# Altium PCB NutriTech PCB.PcbDoc
Units mm, origin at the board's own origin, x right, y up, seen from the top; angles counter-clockwise.
Board outline 55 x 70 mm, 2 copper layers (Top Layer, Bottom Layer); 20 components, 14 nets, 80 pads, 0 vias.
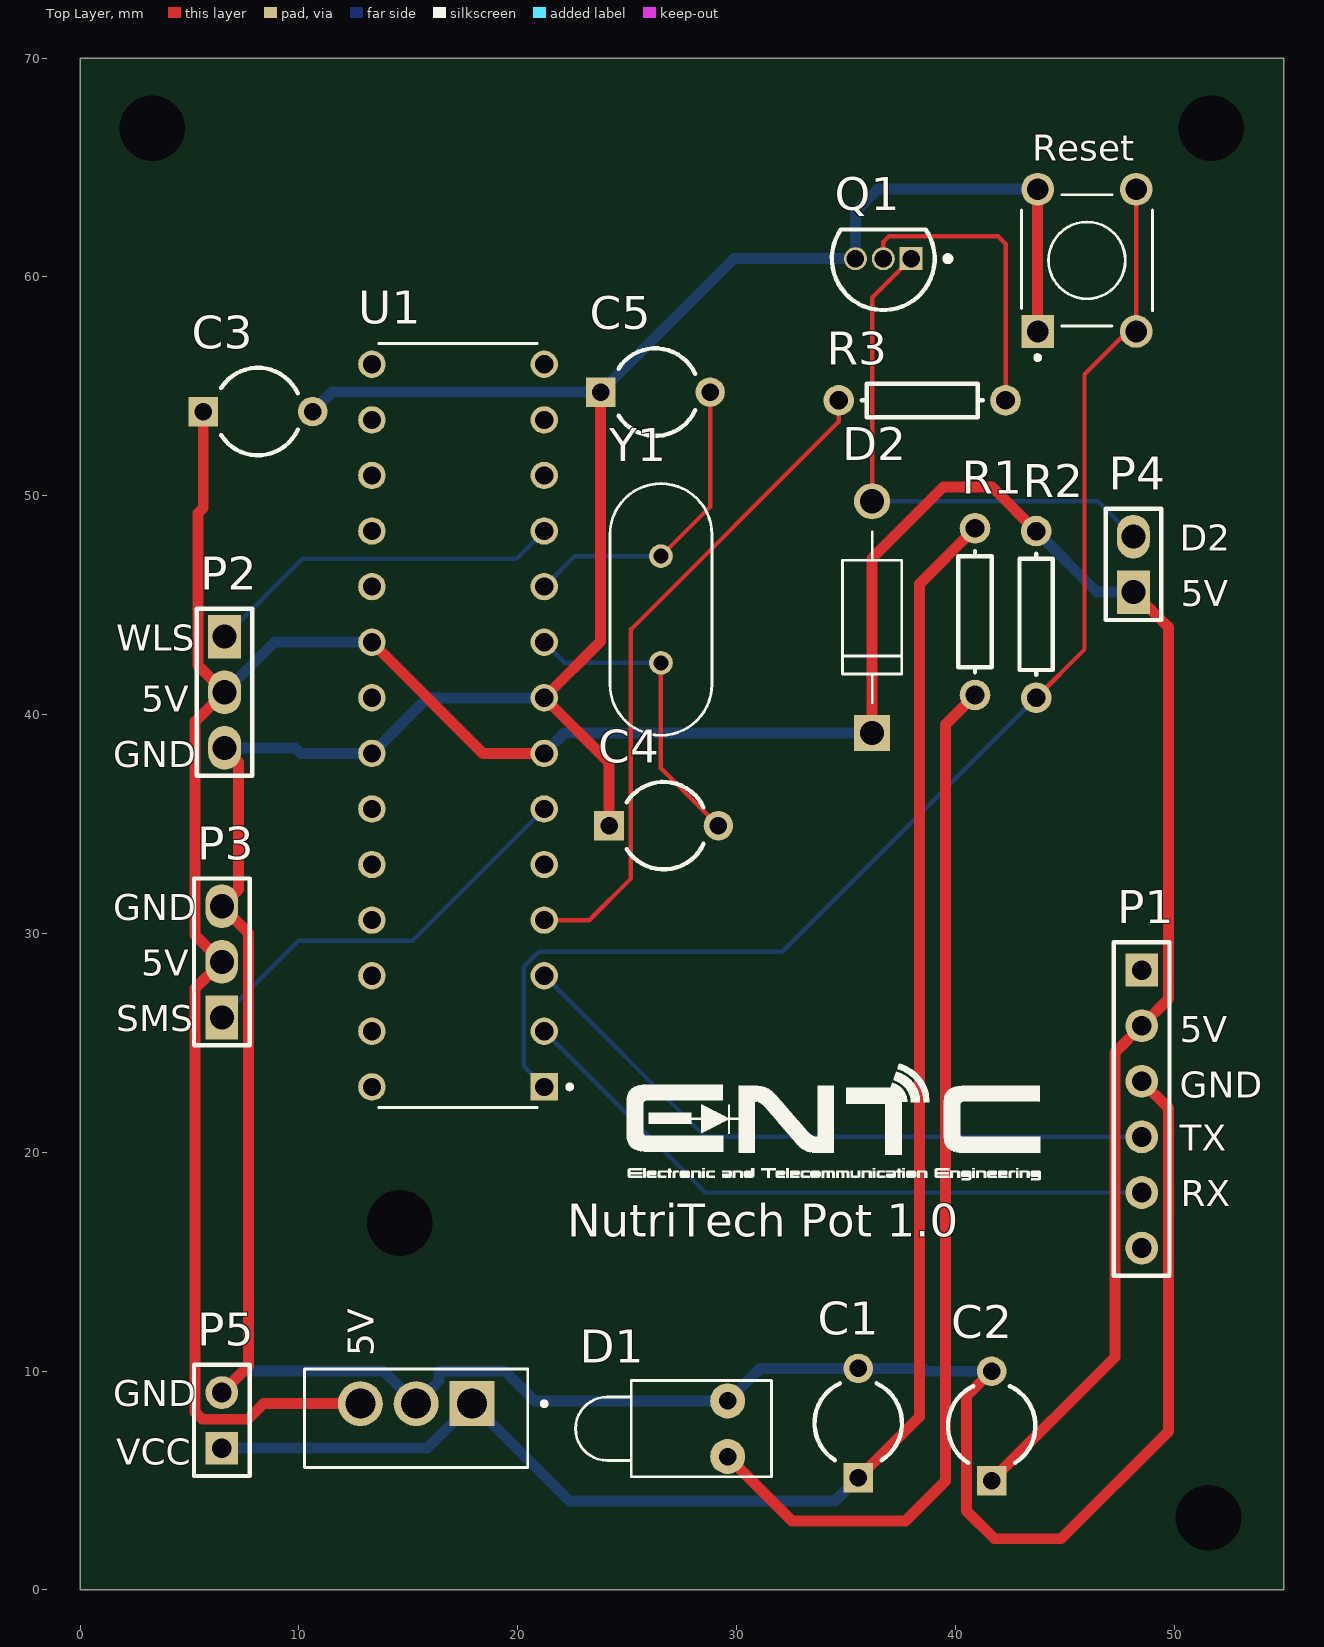
[diagram p0: Top Layer view]
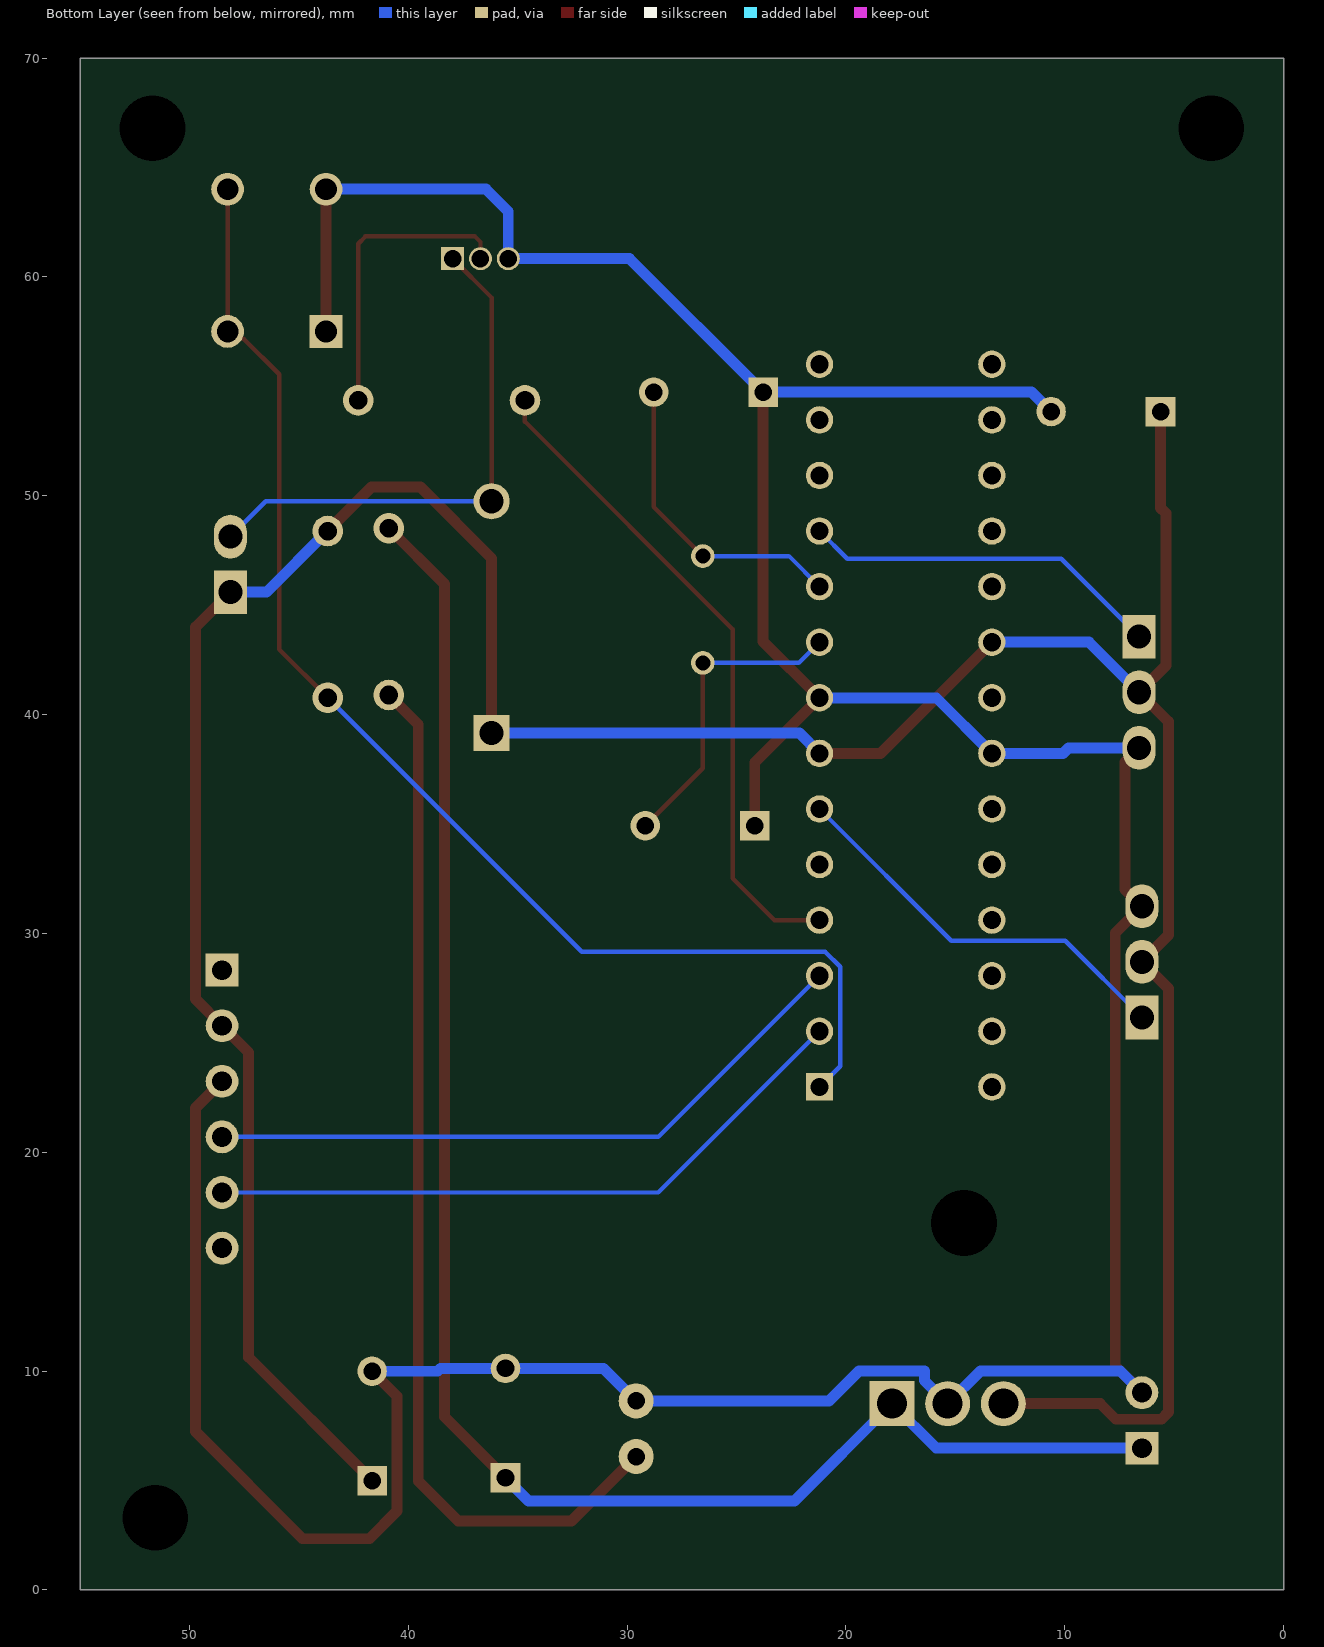
[diagram p1: Bottom Layer view, seen from below]

## Layer stack, top to bottom
Top Solder: solder mask 0.0102, Solder Resist, Dk 3.5
Top Layer: signal copper 0.0356
Dielectric 1: dielectric 0.32, FR-4, Dk 4.8
Bottom Layer: signal copper 0.0356
Bottom Solder: solder mask 0.0102, Solder Resist, Dk 3.5

## Board outline
0,0 55,0 55,70 0,70

## Design rules (kind name [scope] priority, off if disabled: settings)
BoardOutlineClearance [All] p1: gap=0.2 ignorepadtopadclearanceinfootprint=FALSE
Clearance [All] p1: gap=0.203 ignorepadtopadclearanceinfootprint=FALSE except(0.25: Arc-Hole Track-Hole SMDPad-Hole THPad-Hole Via-Hole Fill-Hole Poly-Hole Region-Hole Text-Hole)
ComponentClearance [All] p1: gap=0.127 collisioncheckmode=3 verticalgap=0.127 showdistances=TRUE
DiffPairsRouting [All] p1: maxlimit=0.381 minlimit=0.203 mostfreqgap=0.203 toplayer_minwidth=0.203 toplayer_maxwidth=25.4 toplayer_prefwidth=0.203 bottomlayer_minwidth=0.203 bottomlayer_maxwidth=25.4 bottomlayer_prefwidth=0.203 maxuncoupledlength=12.7
Height [All] p1: minheight=0 maxheight=1816.048 prefheight=12.7
HoleSize [All] p1: absolutevalues=TRUE maxlimit=6.3 minlimit=0.3 maxpercent=80.000 minpercent=20.000
HoleToHoleClearance [All] p1: gap=0.25 allowstackedmicrovias=FALSE
MinimumAnnularRing [All] p1: minimumring=0.076
MinimumSolderMaskSliver [All] p1: minsoldermaskwidth=0
PlaneClearance [All] p1: clearance=0.203
PlaneConnect PlaneConnectPowerPads [InPadClass('PowerPads')] p1: planeconnectstyle=Direct reliefexpansion=0.508 reliefentries=4 reliefconductorwidth=0.254 reliefairgap=0.254
PlaneConnect [All] p2: pad.planeconnectstyle=Relief pad.reliefexpansion=0.3 pad.reliefentries=4 pad.reliefconductorwidth=0.203 pad.reliefairgap=0.203 via.planeconnectstyle=Direct via.reliefexpansion=0.3 via.reliefentries=4 via.reliefconductorwidth=0.127 via.reliefairgap=0.127
PolygonConnect PolygonConnectPowerPads [All vs (InPadClass('PowerPads'))] p1: connectstyle=Direct reliefconductorwidth=0.254 reliefentries=4 polygonreliefangle="90 Angle" airgapwidth=0.254
PolygonConnect [All] p2: thpad.connectstyle=Relief thpad.reliefconductorwidth=0.203 thpad.reliefentries=4 thpad.polygonreliefangle="90 Angle" thpad.airgapwidth=0.203 smdpad.connectstyle=Relief smdpad.reliefconductorwidth=0.203 smdpad.reliefentries=4 smdpad.polygonreliefangle="90 Angle" smdpad.airgapwidth=0.203 via.connectstyle=Direct via.reliefconductorwidth=0.127 via.reliefentries=4 via.polygonreliefangle="90 Angle" via.airgapwidth=0.127
RoutingVias [All] p1: holewidth=0.3 width=0.6 viastyle="Through Hole" minholewidth=0.3 minwidth=0.6 maxholewidth=0.6 maxwidth=6.6
SilkToSilkClearance [All] p1: silktosilkclearance=0
SilkToSolderMaskClearance [IsPad] p1: minsilkscreentomaskgap=0.127 clearancetoexposedcopper=TRUE
SolderMaskExpansion [All] p1: expansion=0.075 istentingtop=FALSE
Width VCC [InNet('VCC')] p1: maxlimit=0.5 minlimit=0.5 preferedwidth=0.5 minimp=50.000000 maximp=50.000000 favimp=50.000000
Width GND [InNet('GND')] p2: maxlimit=0.5 minlimit=0.5 preferedwidth=0.5 minimp=50.000000 maximp=50.000000 favimp=50.000000
Width 5V [InNet('+5V')] p3: maxlimit=0.5 minlimit=0.5 preferedwidth=0.5 minimp=50.000000 maximp=50.000000 favimp=50.000000
Width [All] p4: maxlimit=25.4 minlimit=0.203 preferedwidth=0.203 minimp=50.000000 maximp=50.000000 favimp=50.000000
20 further rules are at their usual default settings.

## Components (designator, comment, footprint, x,y, rotation, side; value= is the part's Value field where it differs from the comment)
5V "L7805" TO255P1020X450X2000-3 15.357,7.846 r180 top (schematic designator VR1)
C1 "Cap2" CAPR5-4X5 35.56,7.62 r90 top value=10uF
C2 "Cap2" CAPR5-4X5 41.656,7.493 r90 top value=1uF
C3 "Cap2" CAPR5-4X5 8.128,53.848 r0 top value=10uF
C4 "Cap2" CAPR5-4X5 26.67,34.925 r0 top value=22pF
C5 "Cap2" CAPR5-4X5 26.289,54.737 r0 top value=22pF
D1 "LED1" LED-1 29.591,7.366 r180 top
D2 "1N4007" DIOAD1060W80L520D270 36.195,44.45 r90 top
P1 "Header 6" HDR1X6 48.514,28.321 r270 top
P2 "Header 3" HDR1X3 6.604,43.561 r270 top
P3 "Header 3" HDR1X3 6.477,26.162 r90 top
P4 "Header 2" HDR1X2#1 48.133,45.593 r90 top
P5 "Header 2" HDR1X2#2 6.477,6.477 r90 top
Q1 "BC337" ONSC-TO-92-3-29-11 36.703,60.833 r180 top
R1 "Res1" AXIAL-0.3 40.894,44.704 r90 top value=1K
R2 "Res1" AXIAL-0.3 43.688,44.577 r270 top value=1K
R3 "Res1" AXIAL-0.3 38.481,54.356 r0 top value=1K
Reset "1825910-6" SW_1825910-6-4 46.01,60.758 r90 top (schematic designator SW1)
U1 "ATMEGA328-PU" DIP787W46P254L3467H508Q28 17.272,39.497 r180 top
Y1 "HC-49/U-S16000000ABJB" XTAL_HC49P488W43L1150T466H350 26.543,44.804 r270 top

## Footprints (in the part's own frame and the unit in brackets; to place one, negate y for a bottom-side part, rotate by r counter-clockwise, add the part's x,y. Pads: shape width x height; smd on the part's side, far side on the other; paste and mask are expansions set on the pad)
AXIAL-0.3 [mm] "Axial Device, Thru-Hole; 2 Leads; 0.3 in Pin Spacing"
  round 1.4 hole 0.85: 1(-3.81,0) 2(3.81,0)
  silkscreen extent -2.77,-0.76 2.77,0.76
CAPR5-4X5 [mm] "Capacitor; 2 Leads"
  rect 1.35x1.35 hole 0.8: 1(-2.5,0)
  round 1.35 hole 0.8: 2(2.5,0)
  silkscreen extent -1.69,-2 1.82,2
DIOAD1060W80L520D270 [mm]
  round 1.65 hole 1.1: A(5.3,0)
  rect 1.65x1.65 / inner round 1.65 / far side rect 1.65x1.65 hole 1.1: C(-5.3,0)
  silkscreen extent -3.9,-1.35 3.9,1.35, body extent -4.24,-1 4.24,1, height 2
DIP787W46P254L3467H508Q28 [mm]
  rect 1.25x1.25 / inner round 1.25 / far side rect 1.25x1.25 hole 0.83: 1(-3.937,16.51)
  round 1.25 hole 0.83: 2(-3.937,13.97) 3(-3.937,11.43) 4(-3.937,8.89) 5(-3.937,6.35) 6(-3.937,3.81) 7(-3.937,1.27) 8(-3.937,-1.27) 9(-3.937,-3.81) 10(-3.937,-6.35) 11(-3.937,-8.89) 12(-3.937,-11.43) 13(-3.937,-13.97) 14(-3.937,-16.51) 15(3.937,-16.51) 16(3.937,-13.97) 17(3.937,-11.43) 18(3.937,-8.89) 19(3.937,-6.35) 20(3.937,-3.81) 21(3.937,-1.27) 22(3.937,1.27) 23(3.937,3.81) 24(3.937,6.35) 25(3.937,8.89) 26(3.937,11.43) 27(3.937,13.97) 28(3.937,16.51)
  silkscreen extent -5.2,-17.45 3.62,17.45, body extent -3.95,-17.34 3.95,17.34, height 4.57
HDR1X2#1 [mm] "Connector; Header; 2 Position"
  rect 2x1.5 hole 1.1: 1(0,0)
  oval 2x1.5 hole 1.1: 2(2.54,0)
  silkscreen extent -1.27,-1.27 3.81,1.27
HDR1X2#2 [mm] "Connector; Header; 2 Position"
  rect 1.5x1.5 hole 0.9: 1(0,0)
  round 1.5 hole 0.9: 2(2.54,0)
  silkscreen extent -1.27,-1.27 3.81,1.27
HDR1X3 [mm] "Connector; Header; 3 Position"
  rect 2x1.5 hole 1.1: 1(0,0)
  oval 2x1.5 hole 1.1: 2(2.54,0) 3(5.08,0)
  silkscreen extent -1.27,-1.27 6.35,1.27
HDR1X6 [mm] "Connector; Header; 6 Position"
  rect 1.5x1.5 hole 0.9: 1(0,0)
  round 1.5 hole 0.9: 2(2.54,0) 3(5.08,0) 4(7.62,0) 5(10.16,0) 6(12.7,0)
  silkscreen extent -1.27,-1.27 13.97,1.27
LED-1 [mm] "LED; 2 Leads"
  round 1.6 hole 0.8: 1(0,1.27) 2(0,-1.27)
  silkscreen extent -2,-2.2 6.95,2.2
ONSC-TO-92-3-29-11 [mm] "TO, 3-Leads, Body Dia 4.7mm, Pitch 1.27mm"
  rect 1.05x1.05 hole 0.8: 1(-1.27,0)
  round 1.05 hole 0.8: 2(0,0) 3(1.27,0)
  silkscreen extent -3.08,-1.34 2.35,2.35, body extent -2.35,-1.33 2.36,2.36, height 7.87
SW_1825910-6-4 [mm]
  rect 1.498x1.498 / inner round 1.498 / far side rect 1.498x1.498 hole 0.99: 1(-3.25,2.25)
  round 1.498 hole 0.99: 2(3.25,2.25) 3(-3.25,-2.25) 4(3.25,-2.25)
  silkscreen extent -4.54,-2.99 3,2.99, body extent -3,-3.9 3,3.9, height 5.01
TO255P1020X450X2000-3 [mm]
  rect 2.055x2.055 / inner round 2.055 / far side rect 2.055x2.055 hole 1.37: 1(-2.55,-0.663)
  round 2.055 hole 1.37: 2(0,-0.663) 3(2.55,-0.663)
  silkscreen extent -5.95,-2.25 5.1,2.25, body extent -5.1,-2.25 5.1,2.25, height 20
XTAL_HC49P488W43L1150T466H350 [mm]
  round 1.08 hole 0.68: 1(-2.44,0) 2(2.44,0)
  silkscreen extent -5.75,-2.33 5.75,2.33

## Part data
5V: "Standard Regulator Pos 5V 1.5A 3-Pin(3+Tab) TO-220FP Tube", Package=None, Availability="Not in stock", Check_prices=https://www.snapeda.com/parts/L7805/STMicroelectronics/view-part/?ref=eda, MF=STMicroelectronics, MP=L7805, Price=None, SnapEDA_Link=https://www.snapeda.com/parts/L7805/STMicroelectronics/view-part/?ref=snap
C1 C2 C3 C4 C5: "Capacitor", PackageDescription="Capacitor; 2 Leads", PackageReference=CAPR5-4X5, Published=23-Sep-2002, Publisher="Altium Limited"
D1: "Typical RED GaAs LED", LatestRevisionDate=08-Jul-2005, LatestRevisionNote="Mech Layer 1 removed.", PackageDescription="LED; 2 Leads", PackageReference=LED-1, Published=8-Jun-2000, Publisher="Altium Limited"
D2: "Diode Standard 1000 V 1A Through Hole DO-41", Package="DO-41 NTE Electronics", Availability="In Stock", Check_prices=https://www.snapeda.com/parts/1N4007/NTE+Electronics/view-part/?ref=eda, MF="NTE Electronics, Inc.", MP=1N4007, Price=None, Purchase-URL=https://pricing.snapeda.com/search/part/1N4007/?ref=eda, SnapEDA_Link=https://www.snapeda.com/parts/1N4007/NTE+Electronics/view-part/?ref=snap
P1: "Header, 6-Pin", LatestRevisionDate=17-Jul-2002, LatestRevisionNote="Re-released for DXP Platform.", Publisher="Altium Limited"
P2 P3: "Header, 3-Pin", LatestRevisionDate=17-Jul-2002, LatestRevisionNote="Re-released for DXP Platform.", Publisher="Altium Limited"
P4 P5: "Header, 2-Pin", LatestRevisionDate=17-Jul-2002, LatestRevisionNote="Re-released for DXP Platform.", Publisher="Altium Limited"
Q1: library part CMP-1048-01458-1, "Amplifier Transistor, NPN Silicon, 3-Pin TO-92, Bulk Box", Manufacturer="On Semiconductor", ComponentLink1Description="Manufacturer URL", ComponentLink1URL=http://www.onsemi.com/, ComponentLink2Description=Datasheet, ComponentLink2URL=http://www.onsemi.com/pub_link/Collateral/BC337-D.PDF, ComponentLink3Description="Package Specification", ComponentLink3URL=http://www.onsemi.cn/pub_link/Collateral/2N6426-D.PDF, DatasheetVersion="Rev. 8", IC Continuous (A)=0.8, Mounting Technology="Through Hole", Note1=0, PackageDescription="3-Pin Transistor Outline, Body 4.825 x 3.685 mm, Pitch 1.27 mm", PackageReference=TO-92-3-29-11_AM_SL, PackageVersion="Rev. AM", Packing="Bulk Box", PartNumber=BC337, Polarity=NPN, RoHS=FALSE
R1 R2 R3: "Resistor", LatestRevisionDate=17-Jul-2002, LatestRevisionNote="Re-released for DXP Platform.", PackageDescription="Axial Device, Thru-Hole; 2 Leads; 0.3 in Pin Spacing", PackageReference=AXIAL-0.3, Published=8-Jun-2000, Publisher="Altium Limited"
Reset: "Switch Push Button OFF (ON) SPST Round Button 0.05A 24VDC Momentary Contact PC Pins Thru-Hole", Package=None, Check_prices=https://www.snapeda.com/parts/1825910-6/TE+Connectivity+ALCOSWITCH+Switches/view-part/?ref=eda, Digi-Key_Part_Number=450-1650-ND, MF="TE Connectivity", MP=1825910-6, Purchase-URL=https://pricing.snapeda.com/search/part/1825910-6/?ref=eda, SnapEDA_Link=https://www.snapeda.com/parts/1825910-6/TE+Connectivity+ALCOSWITCH+Switches/view-part/?ref=snap
U1: "AVR AVRÂ® ATmega Microcontroller IC 8-Bit 20MHz 32KB (16K x 16) FLASH 28-PDIP", Package="DIP-28 Microchip Technology", Availability="In Stock", Check_prices=https://www.snapeda.com/parts/ATMEGA328-PU/Microchip/view-part/?ref=eda, MF=Microchip, MP=ATMEGA328-PU, Price=None, Purchase-URL=https://pricing.snapeda.com/search/part/ATMEGA328-PU/?ref=eda, SnapEDA_Link=https://www.snapeda.com/parts/ATMEGA328-PU/Microchip/view-part/?ref=snap
Y1: "16 MHz Â±30ppm Crystal 18pF 50 Ohms HC-49/US", Package="HC-49/US Citizen Finetech Miyota", Availability="In Stock", Check_prices=https://www.snapeda.com/parts/HC-49/U-S16000000ABJB/Citizen+Finedevice+Co+Ltd/view-part/?ref=eda, MF="Citizen Finedevice Co Ltd", MP=HC-49/U-S16000000ABJB, Price=None, Purchase-URL=https://pricing.snapeda.com/search/part/HC-49/U-S16000000ABJB/?ref=eda, SnapEDA_Link=https://www.snapeda.com/parts/HC-49/U-S16000000ABJB/Citizen+Finedevice+Co+Ltd/view-part/?ref=snap

## Free pads (board coordinates)
  round 2.7 hole 3: 1(3.302,66.802) 2(51.689,66.802) 3(51.562,3.302) 4(14.605,16.764)

## Nets (pads, with @x,y where several pads share a name; then routed paths per layer and width w, separated by ;. In a path a pad name is that pad's centre, name@x,y a point inside that pad or via, vN(x,y) a via of type N, cw(c..) or ccw(c..) an arc to the next point about the centre after c; other vN are vias at no path point)
+5V: 5V.3 C2.1 C3.1 D2.C P1.2 P2.2 P3.2 P4.1 R2.1 U1.7 U1.20 | length 156.8
  Top Layer w0.5: C3.1 5.628,49.443 5.385,49.2 5.385,42.24 P2.2 5.258,39.675 5.258,29.921 P3.2 5.258,27.483 5.258,8.128 5.588,7.798 7.671,7.798 8.382,8.509 5V.3 ; U1.20 18.415,38.227 U1.7 ; D2.C 36.195,47.142 39.446,50.394 41.681,50.394 R2.1 ; C2.1 47.295,10.632 47.295,24.562 P1.2 49.733,27 49.733,43.993 P4.1
  Bottom Layer w0.5: P2.2 8.89,43.307 U1.20 ; U1.7 22.132,39.15 D2.C ; R2.1 46.482,45.593 P4.1
GND: 5V.2 C1.2 C2.2 C3.2 C4.1 C5.1 D1.2 P1.3 P2.3 P3.3 P5.2 Q1.3 Reset.1 Reset.2 U1.8 U1.22 | length 187.5
  Top Layer w0.5: P5.2 7.696,10.236 7.696,30.023 P3.3 7.244,32.009 7.244,37.841 P2.3 ; C5.1 23.789,43.347 U1.8 24.17,37.806 C4.1 ; C2.2 40.513,8.85 40.513,3.607 41.783,2.337 44.831,2.337 49.733,7.239 49.733,22.022 P1.3 ; Reset.1 Reset.2
  Bottom Layer w0.5: P5.2 7.468,10.008 13.858,10.008 5V.2 16.408,9.56 16.408,10.008 19.406,10.008 20.777,8.636 D1.2 31.075,10.12 C1.2 38.532,10.12 38.659,9.993 C2.2 ; P2.3 9.83,38.481 10.084,38.227 U1.22 15.875,40.767 U1.8 ; C3.2 11.517,54.737 C5.1 29.885,60.833 Q1.3 35.433,62.992 36.449,64.008 Reset.2
NetC4_2: C4.2 U1.9 Y1.2 | length 14.3
  Top Layer w0.203: Y1.2 26.543,37.552 C4.2
  Bottom Layer w0.203: U1.9 22.152,42.364 Y1.2
NetC5_2: C5.2 U1.10 Y1.1 | length 14.3
  Top Layer w0.203: Y1.1 28.789,49.49 C5.2
  Bottom Layer w0.203: U1.10 22.606,47.244 Y1.1
NetD1_1: D1.1 R1.1 | length 48.4
  Top Layer w0.5: D1.1 32.537,3.15 37.719,3.15 39.548,4.978 39.548,39.548 R1.1
NetD2_A: D2.A P4.2 Q1.1 | length 24.4
  Top Layer w0.203: D2.A 36.195,59.055 Q1.1
  Bottom Layer w0.203: D2.A 46.516,49.75 P4.2
NetQ1_2: Q1.2 R3.2 | length 13.8
  Top Layer w0.203: Q1.2 36.703,61.595 36.957,61.849 41.961,61.849 42.291,61.519 R3.2
NetR2_2: R2.2 Reset.3 Reset.4 U1.1 | length 59.8
  Top Layer w0.203: R2.2 45.898,42.977 45.898,55.55 47.516,57.168 47.57,57.168 47.91,57.508 Reset.3 Reset.4
  Bottom Layer w0.203: U1.1 20.269,23.927 20.269,28.473 20.955,29.159 32.08,29.159 R2.2
"Relay Module": R3.1 U1.4 | length 30.5
  Top Layer w0.203: U1.4 23.266,30.607 25.171,32.512 25.171,43.891 34.671,53.391 R3.1
RX: P1.5 U1.2 | length 30.4
  Bottom Layer w0.203: U1.2 28.575,18.161 P1.5
"Soil Moisture": P3.1 U1.6 | length 18.7
  Bottom Layer w0.203: P3.1 9.982,29.667 15.189,29.667 U1.6
TX: P1.4 U1.3 | length 30.4
  Bottom Layer w0.203: U1.3 28.575,20.701 P1.4
VCC: 5V.1 C1.1 P5.1 R1.2 | length 77.8
  Top Layer w0.5: C1.1 38.354,7.914 38.354,45.974 R1.2
  Bottom Layer w0.5: P5.1 15.875,6.477 5V.1 22.352,4.064 34.504,4.064 C1.1
"Water Level": P2.1 U1.11 | length 16.6
  Bottom Layer w0.203: P2.1 10.16,47.117 19.939,47.117 U1.11
pads on no net: P1.1 P1.6 U1.5 U1.12 U1.13 U1.14 U1.15 U1.16 U1.17 U1.18 U1.19 U1.21 U1.23 U1.24 U1.25 U1.26 U1.27 U1.28

## Silkscreen, mask and mechanical layers (free items; w line width, h text height)
Top Overlay:
  drawing of 52 lines, arcs and shapes, not listed
  text "D2" at 50.254,47.498 h1.2
  text "5V" at 50.292,44.958 h1.2
  text "WLS" at 1.651,42.926 h1.2
  text "5V" at 2.794,40.132 h1.2
  text "GND" at 1.524,37.592 h1.2
  text "GND" at 1.524,30.607 h1.2
  text "5V" at 2.794,28.067 h1.2
  text "SMS" at 1.651,25.527 h1.2
  text "5V" at 50.254,25.019 h1.2
  text "GND" at 50.254,22.479 h1.2
  text "TX" at 50.254,20.066 h1.2
  text "RX" at 50.292,17.526 h1.2
  text "NutriTech Pot 1.0" at 22.254,16.129 h1.5
  text "GND" at 1.524,8.382 h1.2
  text "VCC" at 1.651,5.715 h1.2
Mechanical 1:
  lines w0.254: 0,0 0.088,0.088 0.088,69.982 54.986,69.982 54.986,0.005 54.981,0 0,0